# Altium PCB Inc_filter_v1.PcbDoc (part 4 of 4)
Units mil, origin at the board's own origin, x right, y up, seen from the top; angles counter-clockwise.
Board outline 13370 x 13370 mil, 2 copper layers (Top Layer, Bottom Layer); 602 components, 261 nets, 1625 pads, 355 vias.
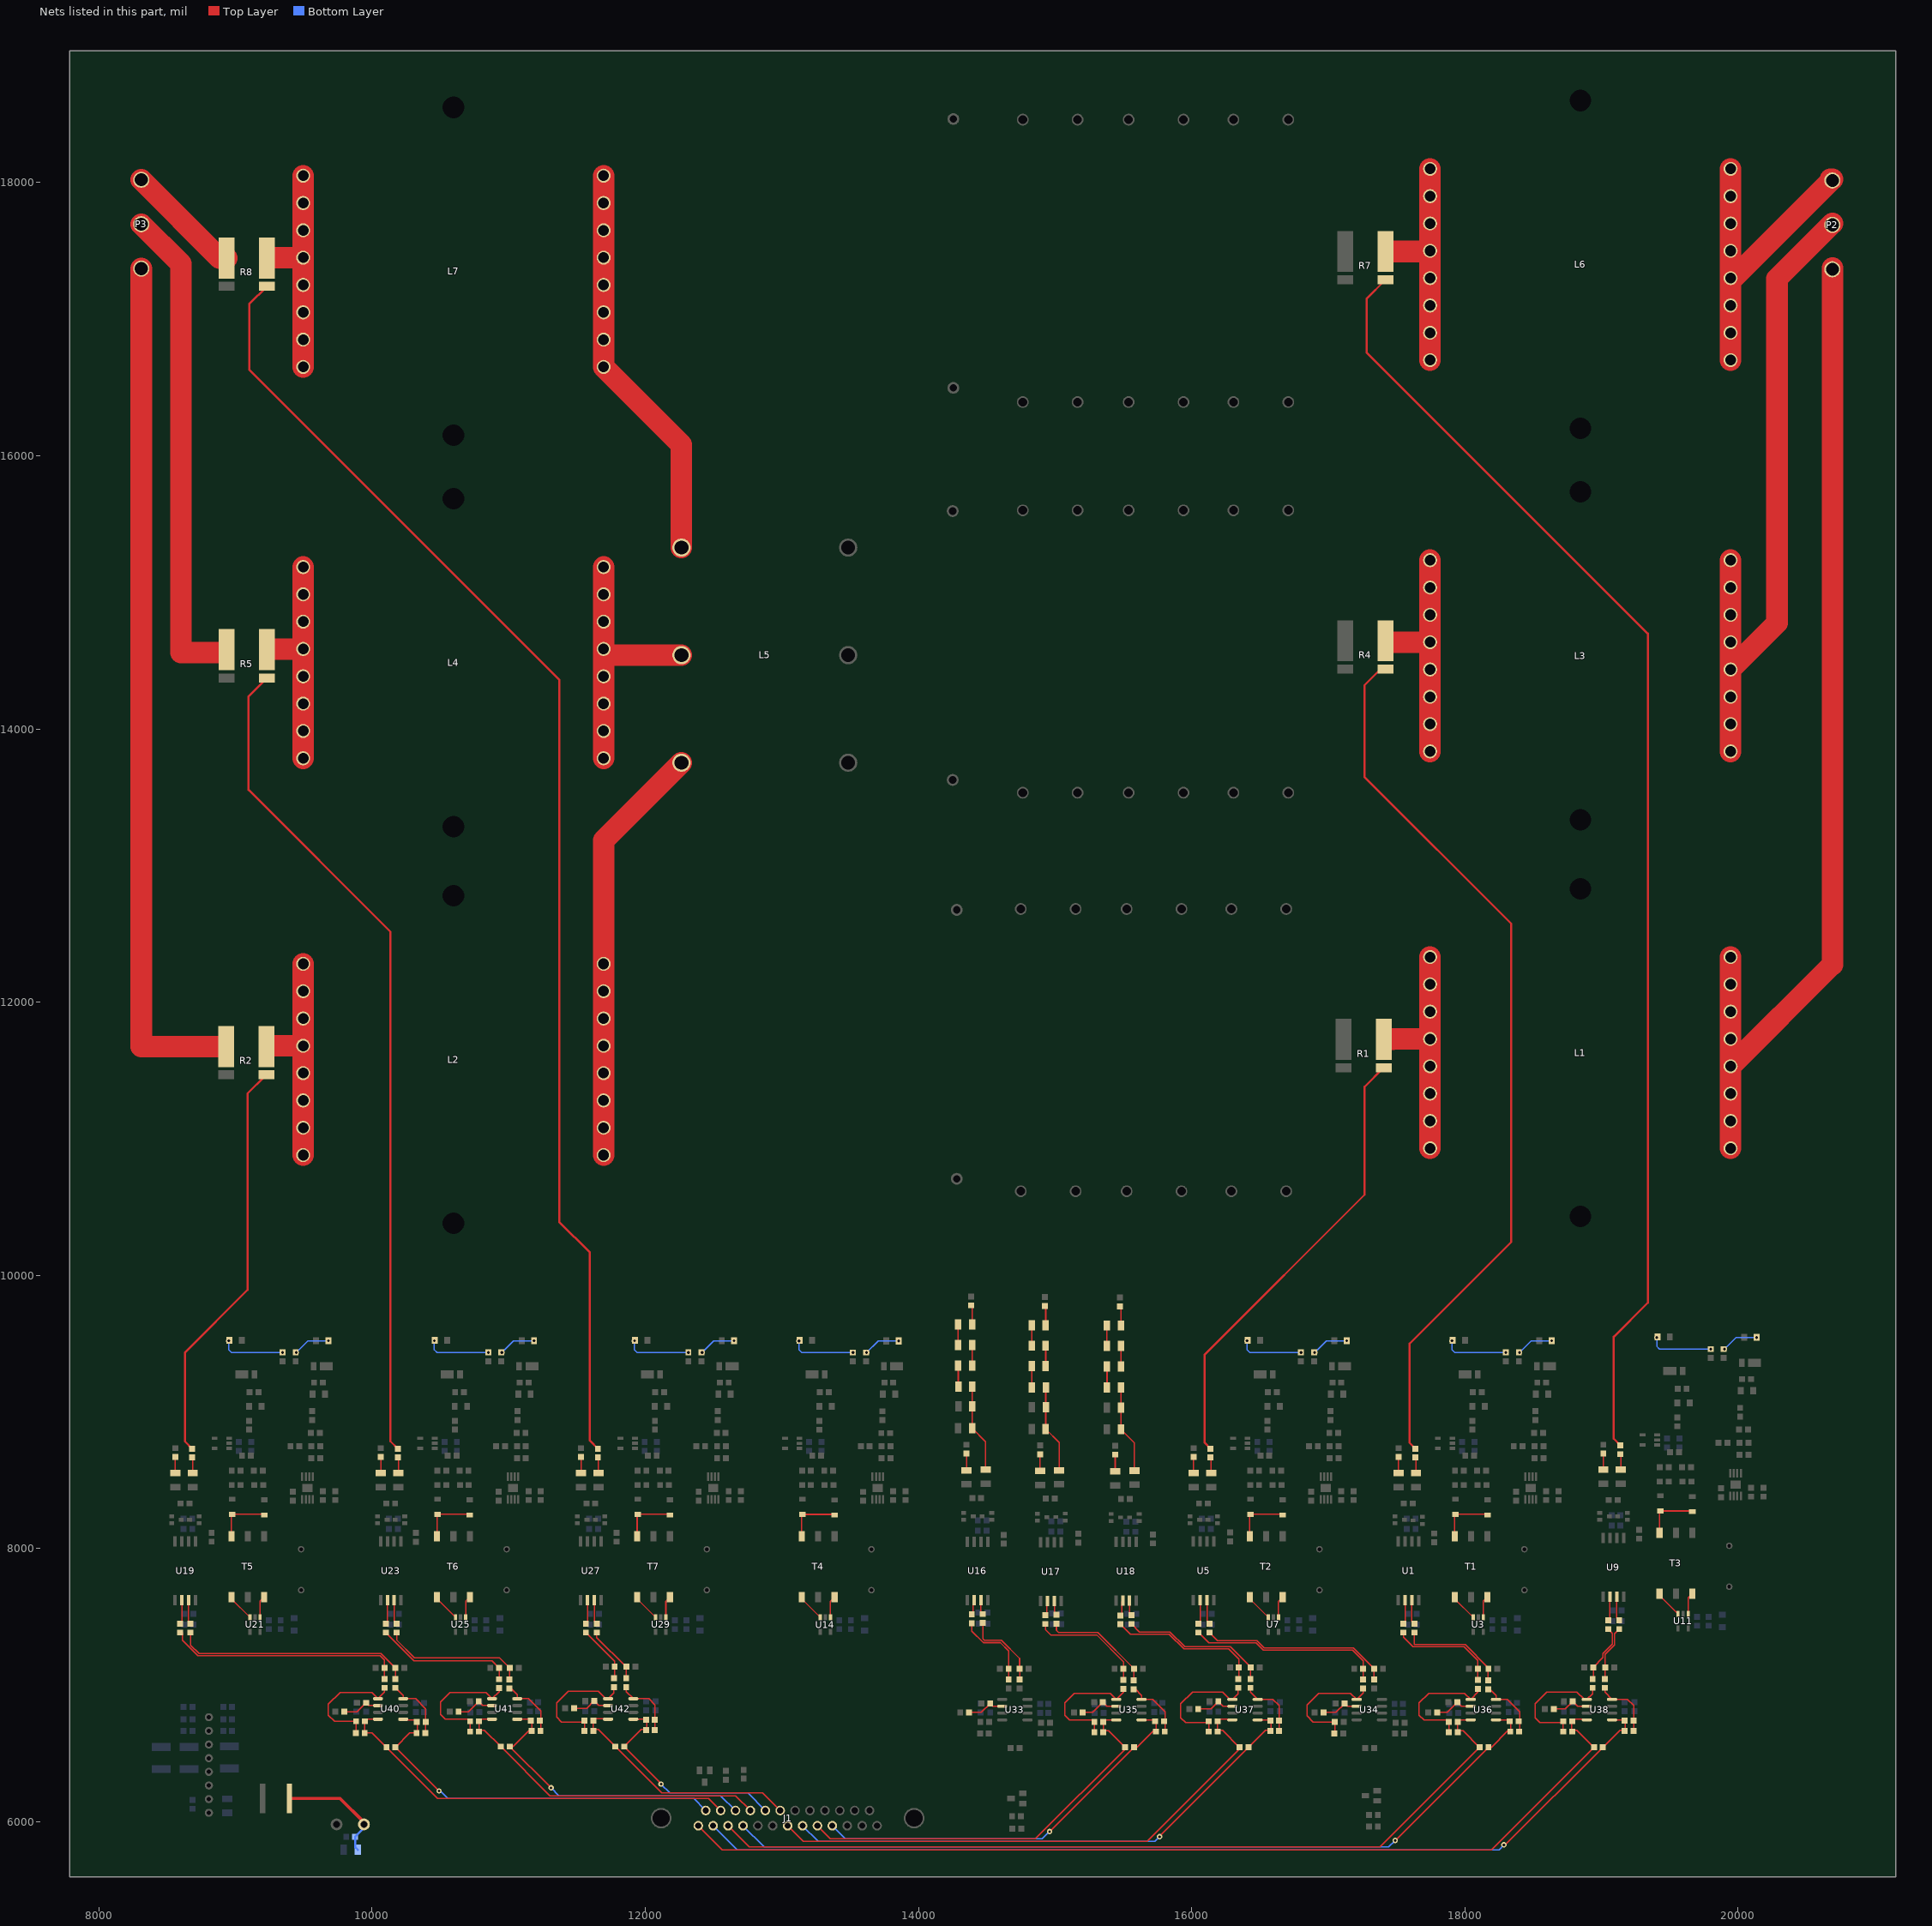
[diagram p4: the nets of this part, all layers, seen from the top]

## Via types
v1: diameter 40, hole 20, Top Layer to Bottom Layer, 355 vias

## Nets (pads, with @x,y where several pads share a name; then routed paths per layer and width w, separated by ;. In a path a pad name is that pad's centre, name@x,y a point inside that pad or via, vN(x,y) a via of type N, cw(c..) or ccw(c..) an arc to the next point about the centre after c; other vN are vias at no path point) (continued)
NetC223_2: C223.2 R115.1 R119.2 U34.1 | length 903.2
  Top Layer w7.87: C223.2@17045.04,6645 17047.52,6647.48 R119.2@17047.52,6730 16890,6730 16845,6775 16845,6855 16930,6940 17162.48,6940 U34.1@17207.48,6895 17255,6942.52 R115.1@17255,6975
NetC224_1: C224.1 J1.10 R120.1 R128.1 U35.5 | length 2932.1
  Top Layer w7.87: v1(14960,5927.52) R128.1@15577.48,6545 15600,6545 15720,6665 15740,6665 15740,6750 15735,6745 U35.5@15632.52,6745
  Bottom Layer w7.87: J1.10@13369.06,5970 13464.06,5875 14905,5875 14957.52,5927.52 v1(14960,5927.52)
NetC224_2: C224.2 R120.2 R124.1 U35.8 | length 446.9
  Top Layer w7.87: R124.1@15585,6972.52 15632.52,6925 U35.8@15632.52,6895 15715,6895 15804.96,6805.04 C224.2@15804.96,6665
NetC225_1: C225.1 J1.4 R121.1 R129.1 U36.5 | length 6231.1
  Top Layer w7.87: v1(17490,5862.52) R129.1@18172.48,6545 18195,6545 18315,6665 18335,6665 18335,6750 18330,6745 U36.5@18227.52,6745
  Bottom Layer w7.87: J1.4@12714.72,5970 12869.72,5815 17442.48,5815 v1(17490,5862.52)
NetC225_2: C225.2 R121.2 R125.1 U36.8 | length 446.9
  Top Layer w7.87: R125.1@18180,6972.52 18227.52,6925 U36.8@18227.52,6895 18310,6895 18399.96,6805.04 C225.2@18399.96,6665
NetC236_1: C236.1 J1.9 R128.2 R133.1 U35.4 | length 2965
  Top Layer w7.87: J1.9@13260,5970 13355,5875 14855,5875 15512.52,6532.52 R128.2@15512.52,6545 15392.52,6665 15350,6665 15352.48,6667.48 R133.1@15352.48,6730 15352.48,6745 U35.4@15447.48,6745
NetC236_2: C236.2 R130.1 R133.2 U35.1 | length 927.4
  Top Layer w7.87: C236.2@15285.04,6665 15287.52,6667.48 R133.2@15287.52,6730 15287.52,6745 15105,6745 15070,6780 15070,6870 15140,6940 15402.48,6940 U35.1@15447.48,6895 15500,6947.52 R130.1@15500,6972.52
NetC237_1: C237.1 J1.3 R129.2 R135.1 U36.4 | length 6256.7
  Top Layer w7.87: J1.3@12605.67,5970 12760.67,5815 17377.52,5815 R129.2@18107.52,6545 17987.52,6665 17945,6665 17947.48,6667.48 R135.1@17947.48,6730 17947.48,6745 U36.4@18042.48,6745
NetC237_2: C237.2 R131.1 R135.2 U36.1 | length 927.4
  Top Layer w7.87: C237.2@17880.04,6665 17882.52,6667.48 R135.2@17882.52,6730 17882.52,6745 17700,6745 17665,6780 17665,6870 17735,6940 17997.48,6940 U36.1@18042.48,6895 18095,6947.52 R131.1@18095,6972.52
NetC238_1: C238.1 J1.8 R136.1 R144.1 U37.5 | length 3995.3
  Top Layer w7.87: v1(15765,5890) 15765,5895.04 R144.1@16414.96,6545 16539.96,6670 16577.52,6670 16580,6672.48 16580,6750 16575,6745 U37.5@16482.52,6745
  Bottom Layer w7.87: J1.8@13150.94,5970 13265.94,5855 15730,5855 v1(15765,5890)
NetC238_2: C238.2 R136.2 R140.1 U37.8 | length 467.9
  Top Layer w7.87: R140.1@16430,6980 16430,6947.52 U37.8@16482.52,6895 16595,6895 16639.96,6850.04 R136.2@16639.96,6740 C238.2@16639.96,6665
NetC239_1: C239.1 J1.2 R137.1 R145.1 U38.5 | length 7291.4
  Top Layer w7.87: v1(18285,5830) 18294.96,5830 R145.1@19009.96,6545 19134.96,6670 19172.52,6670 19175,6672.48 19175,6750 19170,6745 U38.5@19077.52,6745
  Bottom Layer w7.87: J1.2@12496.61,5970 12671.61,5795 18250,5795 v1(18285,5830)
NetC239_2: C239.2 R137.2 R141.1 U38.8 | length 467.9
  Top Layer w7.87: R141.1@19025,6980 19025,6947.52 U38.8@19077.52,6895 19190,6895 19234.96,6850.04 R137.2@19234.96,6740 C239.2@19234.96,6665
NetC250_1: C250.1 J1.7 R144.2 R149.1 U37.4 | length 4056.7
  Top Layer w7.87: J1.7@13041.89,5970 13156.89,5855 15675,5855 16350,6530 R144.2@16350,6545 16225,6670 16187.48,6670 16187.48,6750 16292.48,6750 U37.4@16297.48,6745
NetC250_2: C250.2 R146.1 R149.2 U37.1 | length 927.6
  Top Layer w7.87: C250.2@16125.04,6660 16125.04,6725 15955,6725 15920,6760 15920,6865 16005,6950 16225,6950 16280,6895 U37.1@16297.48,6895 16340,6937.52 R146.1@16340,6980
NetC251_1: C251.1 J1.1 R145.2 R151.1 U38.4 | length 7347
  Top Layer w7.87: J1.1@12387.56,5970 12562.56,5795 18195,5795 R145.2@18945,6545 18820,6670 18782.48,6670 18782.48,6750 18887.48,6750 U38.4@18892.48,6745
NetC251_2: C251.2 R147.1 R151.2 U38.1 | length 927.6
  Top Layer w7.87: C251.2@18720.04,6660 18720.04,6725 18550,6725 18515,6760 18515,6865 18600,6950 18820,6950 18875,6895 U38.1@18892.48,6895 18935,6937.52 R147.1@18935,6980
NetC254_1: C254.1 J1.25 R152.1 R156.1 U40.5 | length 2856.6
  Top Layer w7.87: U40.5@10227.56,6750 10232.56,6745 10330.08,6745 10330.08,6650 C254.1@10325.04,6650 10275.04,6650 R156.1@10170.04,6545 v1(10490,6225)
  Bottom Layer w7.87: v1(10490,6225) 10500,6225 10555,6170 12355,6170 J1.25@12435,6090
NetC254_2: C254.2 R152.2 R154.1 U40.8 | length 477.4
  Top Layer w7.87: R154.1@10170.04,6980 10227.56,6922.48 U40.8@10227.56,6900 10320.04,6900 10392.52,6827.52 R152.2@10392.52,6730 10392.52,6652.52 C254.2@10390,6650
NetC260_1: C260.1 J1.24 R156.2 R159.1 U40.4 | length 3028.7
  Top Layer w7.87: U40.4@10042.52,6750 9962.52,6750 R159.1@9947.52,6735 9945.04,6732.52 C260.1@9945.04,6650 10000.08,6650 R156.2@10105.08,6545 10480.08,6170 12462.95,6170 J1.24@12551.14,6081.81
NetC260_2: C260.2 R157.1 R159.2 U40.1 | length 903.2
  Top Layer w7.87: C260.2@9880.08,6650 9882.56,6652.48 R159.2@9882.56,6735 9725.04,6735 9680.04,6780 9680.04,6860 9765.04,6945 9997.52,6945 U40.1@10042.52,6900 10090.04,6947.52 R157.1@10090.04,6980
NetC261_1: C261.1 J1.23 R160.1 R164.1 U41.5 | length 2253.4
  Top Layer w7.87: U41.5@11062.56,6750 11165.04,6750 11170.04,6755 11170.04,6670 11150.04,6670 11030.04,6550 R164.1@11007.52,6550 v1(11310,6247.52)
  Bottom Layer w7.87: v1(11310,6247.52) 11367.52,6190 12552.01,6190 J1.23@12660.2,6081.81
NetC261_2: C261.2 R160.2 R162.1 U41.8 | length 446.9
  Top Layer w7.87: R162.1@11015.04,6977.52 11062.56,6930 U41.8@11062.56,6900 11145.04,6900 11235,6810.04 C261.2@11235,6670
NetC267_1: C267.1 J1.22 R164.2 R167.1 U41.4 | length 2408.9
  Top Layer w7.87: U41.4@10877.52,6750 10782.52,6750 R167.1@10782.52,6735 10782.52,6672.48 10780.04,6670 10822.56,6670 R164.2@10942.56,6550 11302.56,6190 12661.06,6190 J1.22@12769.25,6081.81
NetC267_2: C267.2 R165.1 R167.2 U41.1 | length 927.4
  Top Layer w7.87: C267.2@10715.08,6670 10717.56,6672.48 R167.2@10717.56,6735 10717.56,6750 10535.04,6750 10500.04,6785 10500.04,6875 10570.04,6945 10832.52,6945 U41.1@10877.52,6900 10930.04,6952.52 R165.1@10930.04,6977.52
NetC268_1: C268.1 J1.21 R168.1 R172.1 U42.5 | length 1625.1
  Top Layer w7.87: U42.5@11912.56,6750 12005.04,6750 12010.04,6755 12010.04,6677.48 12007.56,6675 11970,6675 R172.1@11845,6550 12115,6280 v1(12115,6275)
  Bottom Layer w7.87: v1(12115,6275) 12180,6210 12750.12,6210 J1.21@12878.31,6081.81
NetC268_2: C268.2 R168.2 R170.1 U42.8 | length 467.9
  Top Layer w7.87: R170.1@11860.04,6985 11860.04,6952.52 U42.8@11912.56,6900 12025.04,6900 12070,6855.04 R168.2@12070,6745 C268.2@12070,6670
NetC274_1: C274.1 J1.20 R172.2 R175.1 U42.4 | length 1807.6
  Top Layer w7.87: U42.4@11727.52,6750 11722.52,6755 11617.52,6755 11617.52,6675 11655.04,6675 R172.2@11780.04,6550 12120.04,6210 12859.17,6210 J1.20@12987.36,6081.81
NetC274_2: C274.2 R173.1 R175.2 U42.1 | length 927.6
  Top Layer w7.87: C274.2@11555.08,6665 11555.08,6730 11385.04,6730 11350.04,6765 11350.04,6870 11435.04,6955 11655.04,6955 11710.04,6900 U42.1@11727.52,6900 11770.04,6942.52 R173.1@11770.04,6985
NetC275_1: C275.1 C276.1 L8.1 P1.1 | length 837.7
  Top Layer w23.62: L8.1@9395,6170 9765,6170 P1.1@9940,5995
  Bottom Layer w15.75: C275.1@9895,5795 9875,5815 C276.1@9875,5890 9940,5955 P1.1@9940,5980
NetD3_1: D3.1 D6.2 T1.6 | length 398.9
  Top Layer w10: T1.6@17925.2,8090.28 17925.2,8244.92 D3.1@17930.28,8250 18160.28,8250 D6.2@18165.28,8245
NetD4_K: D4.K R15.2 | length 475.3
  Top Layer w10: D4.K@17905.28,9520.28 D4.K@17910,9525
  Bottom Layer w10: v1@17905.28,9520.28 v1(17905.28,9520) 17905.28,9454.92 17925.24,9434.96 v1(18300.28,9434.96)
NetD7_A: D7.A R17.2 | length 289.4
  Top Layer w10: R17.2@18395.28,9435 v1(18400.28,9435) ; D7.A@18625.28,9510 v1(18635.28,9520)
  Bottom Layer w10: v1(18400.28,9435) 18485.28,9520 v1(18635.28,9520)
NetD11_1: D11.1 D14.2 T2.6 | length 398.9
  Top Layer w10: T2.6@16425.2,8090.28 16425.2,8244.92 D11.1@16430.28,8250 16660.28,8250 D14.2@16665.28,8245
NetD12_K: D12.K R24.2 | length 475.3
  Top Layer w10: D12.K@16405.28,9520.28 D12.K@16410,9525
  Bottom Layer w10: v1@16405.28,9520.28 v1(16405.28,9520) 16405.28,9454.92 16425.24,9434.96 v1(16800.28,9434.96)
NetD15_A: D15.A R26.2 | length 289.4
  Top Layer w10: R26.2@16895.28,9435 v1(16900.28,9435) ; D15.A@17125.28,9510 v1(17135.28,9520)
  Bottom Layer w10: v1(16900.28,9435) 16985.28,9520 v1(17135.28,9520)
NetD19_1: D19.1 D22.2 T3.6 | length 398.9
  Top Layer w10: T3.6@19424.92,8115.28 19424.92,8269.92 D19.1@19430,8275 19660,8275 D22.2@19665,8270
NetD20_K: D20.K R33.2 | length 475.3
  Top Layer w10: D20.K@19405,9545.28 D20.K@19409.72,9550
  Bottom Layer w10: v1@19405,9545.28 v1(19405,9545) 19405,9479.92 19424.96,9459.96 v1(19800,9459.96)
NetD23_A: D23.A R35.2 | length 289.4
  Top Layer w10: R35.2@19895,9460 v1(19900,9460) ; D23.A@20125,9535 v1(20135,9545)
  Bottom Layer w10: v1(19900,9460) 19985,9545 v1(20135,9545)
NetD25_1: D25.1 D28.2 T4.6 | length 398.9
  Top Layer w10: T4.6@13144.92,8090 13144.92,8244.65 D25.1@13150,8249.72 13380,8249.72 D28.2@13385,8244.72
NetD26_K: D26.K R37.2 | length 475.3
  Top Layer w10: D26.K@13125,9520 D26.K@13129.72,9524.72
  Bottom Layer w10: v1@13125,9520 v1(13125,9519.72) 13125,9454.65 13144.96,9434.68 v1(13520,9434.68)
NetD29_A: D29.A R39.2 | length 289.4
  Top Layer w10: R39.2@13615,9434.72 v1(13620,9434.72) ; D29.A@13845,9509.72 v1(13855,9519.72)
  Bottom Layer w10: v1(13620,9434.72) 13705,9519.72 v1(13855,9519.72)
NetD39_1: D39.1 D42.2 T5.6 | length 398.9
  Top Layer w10: T5.6@8969.92,8090.28 8969.92,8244.92 D39.1@8975,8250 9205,8250 D42.2@9210,8245
NetD40_K: D40.K R82.2 | length 475.3
  Top Layer w10: D40.K@8950,9520.28 D40.K@8954.72,9525
  Bottom Layer w10: v1@8950,9520.28 v1(8950,9520) 8950,9454.92 8969.96,9434.96 v1(9345,9434.96)
NetD43_A: D43.A R84.2 | length 289.4
  Top Layer w10: R84.2@9440,9435 v1(9445,9435) ; D43.A@9670,9510 v1(9680,9520)
  Bottom Layer w10: v1(9445,9435) 9530,9520 v1(9680,9520)
NetD47_1: D47.1 D50.2 T6.6 | length 398.9
  Top Layer w10: T6.6@10474.92,8090.28 10474.92,8244.92 D47.1@10480,8250 10710,8250 D50.2@10715,8245
NetD48_K: D48.K R91.2 | length 475.3
  Top Layer w10: D48.K@10455,9520.28 D48.K@10459.72,9525
  Bottom Layer w10: v1@10455,9520.28 v1(10455,9520) 10455,9454.92 10474.96,9434.96 v1(10850,9434.96)
NetD51_A: D51.A R93.2 | length 289.4
  Top Layer w10: R93.2@10945,9435 v1(10950,9435) ; D51.A@11175,9510 v1(11185,9520)
  Bottom Layer w10: v1(10950,9435) 11035,9520 v1(11185,9520)
NetD55_1: D55.1 D58.2 T7.6 | length 398.9
  Top Layer w10: T7.6@11940.2,8090.28 11940.2,8244.92 D55.1@11945.28,8250 12175.28,8250 D58.2@12180.28,8245
NetD56_K: D56.K R100.2 | length 475.3
  Top Layer w10: D56.K@11920.28,9520.28 D56.K@11925,9525
  Bottom Layer w10: v1@11920.28,9520.28 v1(11920.28,9520) 11920.28,9454.92 11940.24,9434.96 v1(12315.28,9434.96)
NetD59_A: D59.A R102.2 | length 289.4
  Top Layer w10: R102.2@12410.28,9435 v1(12415.28,9435) ; D59.A@12640.28,9510 v1(12650.28,9520)
  Bottom Layer w10: v1(12415.28,9435) 12500.28,9520 v1(12650.28,9520)
NetFB1_1: FB1.1 R4.3 | length 6558.7
  Top Layer w15.75: R4.3@17414.09,14437.91 17382.91,14437.91 17263.75,14318.75 17263.75,13649.84 18338.75,12574.84 18338.75,10243.57 17595,9499.82 17595,8773.92 FB1.1@17638,8730.92
NetFB1_2: FB1.2 R11.1 | length 115.3
  Top Layer w7.87: FB1.2@17638,8665.96 17642,8661.96 R11.1@17642,8552.32
NetFB2_2: FB2.2 R14.1 | length 117.6
  Top Layer w7.87: R14.1@17514,8552.32 FB2.2@17514,8669.96
NetFB5_1: FB5.1 R1.3 | length 3363.7
  Top Layer w7.87: FB5.1@16135,8734.92 16130,8739.92 FB5.1@16135,8744.92
  Top Layer w15.75: FB5.1@16138,8730.92 16095,8773.92 16095,9419.82 17265,10589.82 17265,11380 R1.3@17405,11520
NetFB5_2: FB5.2 R20.1 | length 115.3
  Top Layer w7.87: FB5.2@16138,8665.96 16142,8661.96 R20.1@16142,8552.32
NetFB6_2: FB6.2 R23.1 | length 117.6
  Top Layer w7.87: R23.1@16014,8552.32 FB6.2@16014,8669.96
NetFB9_1: FB9.1 R7.3 | length 9565.2
  Top Layer w15.75: R7.3@17419.09,17287.91 17280,17148.82 17280,16755.75 19338.75,14697 19338.75,9798.75 19090,9550 19090,8803.65 FB9.1@19137.72,8755.92
NetFB9_2: FB9.2 R29.1 | length 115.3
  Top Layer w7.87: FB9.2@19137.72,8690.96 19141.72,8686.96 R29.1@19141.72,8577.32
NetFB10_2: FB10.2 R32.1 | length 117.6
  Top Layer w7.87: R32.1@19013.72,8577.32 FB10.2@19013.72,8694.96
NetFB15_2: FB15.2 R42.1 | length 142.6
  Top Layer w10: FB15.2@14386.18,9780.04 14392.36,9773.86 R42.1@14392.36,9640
NetFB16_2: FB16.2 R54.1 | length 142.6
  Top Layer w10: FB16.2@14924.96,9775 14931.14,9768.82 R54.1@14931.14,9634.96
NetFB17_2: FB17.2 R66.1 | length 142.6
  Top Layer w10: FB17.2@15475,9772.52 15481.18,9766.34 R66.1@15481.18,9632.48
NetFB18_1: FB18.1 R2.3 | length 3009.6
  Top Layer w7.87: FB18.1@8682.72,8730.92 FB18.1@8685,8733.2 ; R2.3@9215,11457.91 R2.3@9225,11467.91
  Top Layer w15.75: FB18.1@8682.72,8730.92 8628.62,8785.02 8628.62,9433.62 9088.62,9893.62 9088.62,11331.54 R2.3@9215,11457.91
NetFB18_2: FB18.2 R78.1 | length 115.3
  Top Layer w7.87: FB18.2@8682.72,8665.96 8686.72,8661.96 R78.1@8686.72,8552.32
NetFB19_2: FB19.2 R81.1 | length 117.6
  Top Layer w7.87: R81.1@8558.72,8552.32 FB19.2@8558.72,8669.96
NetFB22_1: FB22.1 R5.3 | length 6182
  Top Layer w7.87: R5.3@9230,14372.91 R5.3@9250,14352.91 ; FB22.1@10187.72,8730.92 FB22.1@10190,8733.2
  Top Layer w15.75: R5.3@9230,14372.91 9095,14237.91 9095,13553.41 10133.62,12514.78 10133.62,8785.02 FB22.1@10187.72,8730.92
NetFB22_2: FB22.2 R87.1 | length 115.3
  Top Layer w7.87: FB22.2@10187.72,8665.96 10191.72,8661.96 R87.1@10191.72,8552.32
NetFB23_2: FB23.2 R90.1 | length 117.6
  Top Layer w7.87: R90.1@10063.72,8552.32 FB23.2@10063.72,8669.96
NetFB26_1: FB26.1 R8.3 | length 9620.4
  Top Layer w15.75: R8.3@9230,17240 9100,17110 9100,16630 11370,14360 11370,10390 11593.75,10166.25 11593.75,8790.17 FB26.1@11653,8730.92
NetFB26_2: FB26.2 R96.1 | length 115.3
  Top Layer w7.87: FB26.2@11653,8665.96 11657,8661.96 R96.1@11657,8552.32
NetFB27_2: FB27.2 R99.1 | length 117.6
  Top Layer w7.87: R99.1@11529,8552.32 FB27.2@11529,8669.96
NetL1_1: L1.1 L1.2 L1.3 L1.4 L1.5 L1.6 L1.7 L1.8 P2.1 | length 7553.4
  Top Layer w157.48: L1.1@19945,10930 L1.2@19945,11130 L1.3@19945,11330 L1.4@19945,11530 ; L1.8@19945,12330 L1.7@19945,12130 L1.6@19945,11930 L1.5@19945,11730 L1.4@19945,11530 ; P2.1@20690,17374.8 P2.1@20690,17364.69 20690,12275 L1.4@19945,11530
NetL1_9: L1.9 L1.10 L1.11 L1.12 L1.13 L1.14 L1.15 L1.16 R1.4 | length 1676.2
  Top Layer w157.48: 17470,11727.09 17472.91,11730 L1.12@17745,11730 ; L1.16@17745,10930 L1.15@17745,11130 L1.14@17745,11330 L1.13@17745,11530 L1.12@17745,11730 ; L1.9@17745,12330 L1.10@17745,12130 L1.11@17745,11930 L1.12@17745,11730
NetL2_1: L2.1 L2.2 L2.3 L2.4 L2.5 L2.6 L2.7 L2.8 L5.6 | length 3108.5
  Top Layer w157.48: L2.1@11695,10880 L2.2@11695,11080 L2.3@11695,11280 L2.4@11695,11480 L2.5@11695,11680 L2.6@11695,11880 L2.7@11695,12080 L2.8@11695,12280 11695,13183.07 L5.6@12264.53,13752.6
NetL2_9: L2.9 L2.10 L2.11 L2.12 L2.13 L2.14 L2.15 L2.16 R2.4 | length 1625
  Top Layer w157.48: R2.4@9270,11680 L2.12@9495,11680 ; L2.16@9495,10880 L2.15@9495,11080 L2.14@9495,11280 L2.13@9495,11480 L2.12@9495,11680 ; L2.9@9495,12280 L2.10@9495,12080 L2.11@9495,11880 L2.12@9495,11680
NetL3_1: L3.1 L3.2 L3.3 L3.4 L3.5 L3.6 L3.7 L3.8 P2.2 | length 4973.6
  Top Layer w157.48: L3.1@19945,13835 L3.2@19945,14035 L3.3@19945,14235 L3.4@19945,14435 ; L3.8@19945,15235 L3.7@19945,15035 L3.6@19945,14835 L3.5@19945,14635 L3.4@19945,14435 ; P2.2@20690,17700 20285,17295 20285,14775 L3.4@19945,14435
NetL3_9: L3.9 L3.10 L3.11 L3.12 L3.13 L3.14 L3.15 L3.16 R4.4 | length 1675
  Top Layer w157.48: R4.4@17470,14635 L3.12@17745,14635 ; L3.16@17745,13835 L3.15@17745,14035 L3.14@17745,14235 L3.13@17745,14435 L3.12@17745,14635 ; L3.9@17745,15235 L3.10@17745,15035 L3.11@17745,14835 L3.12@17745,14635
NetL4_1: L4.1 L4.2 L4.3 L4.4 L4.5 L4.6 L4.7 L4.8 L5.5 | length 1988.2
  Top Layer w157.48: L4.1@11695,13785 L4.2@11695,13985 L4.3@11695,14185 L4.4@11695,14385 L4.5@11695,14585 ; L4.8@11695,15185 L4.7@11695,14985 L4.6@11695,14785 L4.5@11695,14585 ; L5.5@12264.53,14540 11740,14540 L4.5@11695,14585
NetL4_9: L4.9 L4.10 L4.11 L4.12 L4.13 L4.14 L4.15 L4.16 R5.4 | length 1620
  Top Layer w157.48: R5.4@9275,14585 L4.12@9495,14585 ; L4.16@9495,13785 L4.15@9495,13985 L4.14@9495,14185 L4.13@9495,14385 L4.12@9495,14585 ; L4.9@9495,15185 L4.10@9495,14985 L4.11@9495,14785 L4.12@9495,14585
NetL5_4: L5.4 L7.1 L7.2 L7.3 L7.4 L7.5 L7.6 L7.7 L7.8 | length 2958.5
  Top Layer w157.48: L7.8@11695,18050 L7.7@11695,17850 L7.6@11695,17650 L7.5@11695,17450 L7.4@11695,17250 L7.3@11695,17050 L7.2@11695,16850 L7.1@11695,16650 12264.53,16080.47 L5.4@12264.53,15327.4
NetL6_1: L6.1 L6.2 L6.3 L6.4 L6.5 L6.6 L6.7 L6.8 P2.3 | length 2460.2
  Top Layer w157.48: L6.1@19945,16700 L6.2@19945,16900 L6.3@19945,17100 L6.4@19945,17300 ; L6.8@19945,18100 L6.7@19945,17900 L6.6@19945,17700 L6.5@19945,17500 L6.4@19945,17300 ; P2.3@20675.2,18025.2 20690,18025.2 19964.8,17300 L6.4@19945,17300
NetL6_9: L6.9 L6.10 L6.11 L6.12 L6.13 L6.14 L6.15 L6.16 R7.4 | length 1687.1
  Top Layer w157.48: R7.4@17460,17495 17740,17495 L6.12@17745,17500 ; L6.16@17745,16700 L6.15@17745,16900 L6.14@17745,17100 L6.13@17745,17300 L6.12@17745,17500 ; L6.9@17745,18100 L6.10@17745,17900 L6.11@17745,17700 L6.12@17745,17500
NetL7_9: L7.9 L7.10 L7.11 L7.12 L7.13 L7.14 L7.15 L7.16 R8.4 | length 1612.1
  Top Layer w157.48: R8.4@9282.91,17450 L7.12@9495,17450 ; L7.16@9495,16650 L7.15@9495,16850 L7.14@9495,17050 L7.13@9495,17250 L7.12@9495,17450 ; L7.9@9495,18050 L7.10@9495,17850 L7.11@9495,17650 L7.12@9495,17450
NetP3_1: P3.1 R8.1 | length 863.3
  Top Layer w157.48: P3.1@8310,18020.2 8883.11,17447.09 R8.1@8935.91,17447.09
NetP3_2: P3.2 R5.1 | length 3515.1
  Top Layer w157.48: P3.2@8310,17695 8600,17405 8600,14560 8860,14560
NetP3_3: P3.3 R2.1 | length 6264.8
  Top Layer w157.48: P3.3@8310,17369.8 8310,11675 R2.1@8880,11675
NetR12_1: R12.1 U1.7 | length 179.5
  Top Layer w7.87: U1.7@17612,7621.96 17612,7467.96 R12.1@17630,7449.96
NetR12_2: R12.2 R125.2 R127.1 | length 791.3
  Top Layer w7.87: R12.2@17630,7385 17630,7295.75 18001.52,7295.75 18170,7127.27 R125.2@18170,7034.96
NetR13_1: R13.1 U1.6 | length 177
  Top Layer w7.87: R13.1@17550,7449.96 17562,7461.96 U1.6@17562,7621.96
NetR13_2: R13.2 R131.2 R134.1 | length 792.8
  Top Layer w7.87: R13.2@17550,7385 17550,7350 17620.13,7279.87 17994.95,7279.87 18095,7179.82 R134.1@18095,7120 R131.2@18095,7037.48
NetR21_1: R21.1 U5.7 | length 179.5
  Top Layer w7.87: U5.7@16112,7621.96 16112,7467.96 R21.1@16130,7449.96
NetR21_2: R21.2 R109.2 R111.1 | length 1394.9
  Top Layer w7.87: R21.2@16130,7385 16189.25,7325.75 16476.52,7325.75 16531.52,7270.75 17184.29,7270.75 R111.1@17335.04,7120 R109.2@17335,7039.96 R109.2@17335,7039.96
NetR22_1: R22.1 U5.6 | length 177
  Top Layer w7.87: R22.1@16050,7449.96 16062,7461.96 U5.6@16062,7621.96
NetR22_2: R22.2 R115.2 R118.1 | length 1428.5
  Top Layer w7.87: R22.2@16050,7385 16125.13,7309.87 16469.95,7309.87 16524.95,7254.87 17177.72,7254.87 17255,7177.59 R118.1@17255,7120 R115.2@17255,7039.96
NetR30_1: R30.1 U9.7 | length 179.5
  Top Layer w7.87: U9.7@19111.72,7646.96 19111.72,7492.96 R30.1@19129.72,7474.96
NetR30_2: R30.2 R141.2 R143.1 | length 408.4
  Top Layer w7.87: R141.2@19025,7044.96 19025,7127.48 R143.1@19027.52,7130 19027.52,7225.25 19095.75,7293.48 19095.75,7376.02 R30.2@19129.72,7410
NetR31_1: R31.1 U9.6 | length 177
  Top Layer w7.87: R31.1@19049.72,7474.96 19061.72,7486.96 U9.6@19061.72,7646.96
NetR31_2: R31.2 R147.2 R150.1 | length 433.9
  Top Layer w7.87: R147.2@18935,7044.96 18940,7049.96 R150.1@18940,7130 19011.65,7201.65 19011.65,7231.82 19079.87,7300.05 19079.87,7376.02 ; R31.2@19049.72,7410 19080,7379.72
NetR42_2: R42.2 R43.1 | length 150
  Top Layer w10: R43.1@14290,9490 R42.2@14290,9640
NetR43_2: R43.2 R49.1 | length 150
  Top Layer w10: R49.1@14392.36,9340 R43.2@14392.36,9490
NetR44_1: R44.1 R46.2 R47.2 R50.2 | length 649.1
  Top Layer w10: R50.2@14393.54,9185 14392.36,9183.82 R47.2@14392.36,8880 14491.18,8781.18 R44.1@14491.18,8577.36
NetR45_1: R45.1 U16.7 | length 112.1
  Top Layer w10: U16.7@14456.18,7620.87 14456.18,7534.96 R45.1@14471.18,7519.96 R45.1@14471.18,7515
NetR45_2: R45.2 R108.2 R110.1 | length 599.3
  Top Layer w7.87: R108.2@14740,7039.96 R110.1@14740.04,7120
  Top Layer w10: R45.2@14471.18,7455 14471.18,7339.27 14481.36,7329.1 14605.9,7329.1 14740,7195 R110.1@14740.04,7120
NetR48_1: R48.1 U16.6 | length 107.1
  Top Layer w10: R48.1@14391.18,7520 14400,7528.82 14400,7614.69 U16.6@14406.18,7620.87
NetR48_2: R48.2 R114.2 R116.1 | length 597.4
  Top Layer w7.87: R114.2@14660,7039.96 R116.1@14660,7105
  Top Layer w10: R48.2@14390,7452.52 14390,7395 14473.9,7311.1 14598.45,7311.1 14660,7249.54 R116.1@14660,7120 R116.1@14660,7105
NetR49_2: R49.2 R50.1 | length 155.5
  Top Layer w10: R49.2@14290,9340 14291.18,9338.82 R50.1@14291.18,9185
NetR51_1: R51.1 R52.1 | length 122.7
  Top Layer w10: R52.1@14351.18,8572.36 R51.1@14351.18,8695.04
NetR54_2: R54.2 R55.1 | length 150
  Top Layer w10: R55.1@14828.78,9484.96 R54.2@14828.78,9634.96
NetR55_2: R55.2 R61.1 | length 150
  Top Layer w10: R61.1@14931.14,9334.96 R55.2@14931.14,9484.96
NetR56_1: R56.1 R58.2 R59.2 R62.2 | length 649.1
  Top Layer w10: R62.2@14932.32,9179.96 14931.14,9178.78 R59.2@14931.14,8874.96 15029.96,8776.14 R56.1@15029.96,8572.32
NetR57_1: R57.1 U17.7 | length 112.1
  Top Layer w10: U17.7@14994.96,7615.83 14994.96,7529.92 R57.1@15009.96,7514.92 R57.1@15009.96,7509.96
NetR57_2: R57.2 R124.2 R126.1 | length 819.6
  Top Layer w7.87: R124.2@15575,7034.96 15575,7117.48 R126.1@15577.52,7120
  Top Layer w10: R57.2@15009.96,7449.96 15009.96,7400.04 15025,7385 15312.52,7385 R126.1@15577.52,7120
NetR60_1: R60.1 U17.6 | length 107.1
  Top Layer w10: R60.1@14929.96,7514.96 14938.78,7523.78 14938.78,7609.65 U17.6@14944.96,7615.83
NetR60_2: R60.2 R130.2 R132.1 | length 841.9
  Top Layer w7.87: R132.1@15496.24,7116.24 15500,7112.48 R130.2@15500,7037.48
  Top Layer w10: R60.2@14928.78,7447.48 14928.78,7406.22 14968,7367 15305.06,7367 15500,7172.06 R132.1@15500,7120
NetR61_2: R61.2 R62.1 | length 155.5
  Top Layer w10: R61.2@14828.78,9334.96 14829.96,9333.78 R62.1@14829.96,9179.96
NetR63_1: R63.1 R64.1 | length 122.7
  Top Layer w10: R64.1@14889.96,8567.32 R63.1@14889.96,8690
NetR66_2: R66.2 R67.1 | length 150
  Top Layer w10: R67.1@15378.82,9482.48 R66.2@15378.82,9632.48
NetR67_2: R67.2 R73.1 | length 150
  Top Layer w10: R73.1@15481.18,9332.48 R67.2@15481.18,9482.48
NetR68_1: R68.1 R70.2 R71.2 R74.2 | length 649.1
  Top Layer w10: R74.2@15482.36,9177.48 15481.18,9176.3 R71.2@15481.18,8872.48 15580,8773.66 R68.1@15580,8569.84
NetR69_1: R69.1 U18.7 | length 112.1
  Top Layer w10: U18.7@15545,7613.35 15545,7527.44 R69.1@15560,7512.44 R69.1@15560,7507.48
NetR69_2: R69.2 R140.2 R142.1 | length 1090.1
  Top Layer w7.87: R69.2@15560,7447.48 15617.91,7389.57 15840.43,7389.57 15950,7280 16282.52,7280 R142.1@16432.52,7130 16430,7127.48 R140.2@16430,7044.96
NetR72_1: R72.1 U18.6 | length 107.1
  Top Layer w10: R72.1@15480,7512.48 15488.82,7521.3 15488.82,7607.17 U18.6@15495,7613.35
NetR72_2: R72.2 R146.2 R148.1 | length 1118.9
  Top Layer w7.87: R72.2@15478.82,7445 15550.13,7373.69 15833.86,7373.69 15943.42,7264.13 16270.87,7264.13 16345,7190 R148.1@16345,7130 16345,7049.96 R146.2@16340,7044.96
NetR73_2: R73.2 R74.1 | length 155.5
  Top Layer w10: R73.2@15378.82,9332.48 15380,9331.3 R74.1@15380,9177.48
NetR75_1: R75.1 R76.1 | length 122.7
  Top Layer w10: R76.1@15440,8564.84 R75.1@15440,8687.52
NetR79_1: R79.1 U19.7 | length 185.1
  Top Layer w7.87: U19.7@8656.72,7621.96 8656.72,7458.28 8665.04,7449.96 R79.1@8670,7449.96 R79.1@8674.72,7449.96
NetR79_2: R79.2 R154.2 R155.1 | length 1742.1
  Top Layer w7.87: R79.2@8670,7385 8670,7292.27 8732.27,7230 10065.08,7230 R155.1@10170.08,7125 10170.04,7124.96 R154.2@10170.04,7044.96
NetR80_1: R80.1 U19.6 | length 177
  Top Layer w7.87: R80.1@8594.72,7449.96 8606.72,7461.96 U19.6@8606.72,7621.96
NetR80_2: R80.2 R157.2 R158.1 | length 1749.1
  Top Layer w7.87: R80.2@8594.72,7385 8610,7385 8610,7329.82 8725.7,7214.13 10058.5,7214.13 10090.04,7182.59 R158.1@10090.04,7125 R157.2@10090.04,7044.96
NetR88_1: R88.1 U23.7 | length 179.5
  Top Layer w7.87: U23.7@10161.72,7621.96 10161.72,7467.96 R88.1@10179.72,7449.96
NetR88_2: R88.2 R162.2 R163.1 | length 1053.7
  Top Layer w7.87: R162.2@11005.04,7039.96 11005.04,7122.48 R163.1@11007.56,7125
  Top Layer w10: R88.2@10179.72,7385 10179.72,7330.28 10310,7200 10932.56,7200 R163.1@11007.56,7125
NetR89_1: R89.1 U23.6 | length 177
  Top Layer w7.87: R89.1@10099.72,7449.96 10111.72,7461.96 U23.6@10111.72,7621.96
NetR89_2: R89.2 R165.2 R166.1 | length 1018.4
  Top Layer w7.87: R166.1@10926.28,7121.24 10930.04,7117.48 R165.2@10930.04,7042.48
  Top Layer w10: R89.2@10099.72,7385 10099.72,7384.82 10307.03,7177.52 10877.52,7177.52 R166.1@10930.04,7125
NetR97_1: R97.1 U27.7 | length 179.5
  Top Layer w7.87: U27.7@11627,7621.96 11627,7467.96 R97.1@11645,7449.96
NetR97_2: R97.2 R170.2 R171.1 | length 424.1
  Top Layer w7.87: R97.2@11645,7385 11645,7347.52 11860.04,7132.48 R170.2@11860.04,7049.96
NetR98_1: R98.1 U27.6 | length 177
  Top Layer w7.87: R98.1@11565,7449.96 11577,7461.96 U27.6@11577,7621.96
NetR98_2: R98.2 R173.2 R174.1 | length 424.1
  Top Layer w7.87: R98.2@11565,7385 11775.04,7174.96 R174.1@11775.04,7135 11775.04,7054.96 R173.2@11770.04,7049.96
NetT1_1: T1.1 U3.3 | length 204.7
  Top Layer w10: T1.1@17925.2,7645 17925.2,7631.57 U3.3@18060.47,7496.3
NetT1_3: T1.3 U3.1 | length 161.2
  Top Layer w10: U3.1@18135.28,7496.3 18135.28,7614.92 T1.3@18165.35,7645
NetT2_1: T2.1 U7.3 | length 204.7
  Top Layer w10: T2.1@16425.2,7645 16425.2,7631.57 U7.3@16560.47,7496.3
NetT2_3: T2.3 U7.1 | length 161.2
  Top Layer w10: U7.1@16635.28,7496.3 16635.28,7614.92 T2.3@16665.35,7645
NetT3_1: T3.1 U11.3 | length 204.7
  Top Layer w10: T3.1@19424.92,7670 19424.92,7656.57 U11.3@19560.2,7521.3
NetT3_3: T3.3 U11.1 | length 161.2
  Top Layer w10: U11.1@19635,7521.3 19635,7639.92 T3.3@19665.08,7670
NetT4_1: T4.1 U14.3 | length 204.7
  Top Layer w10: T4.1@13144.92,7644.72 13144.92,7631.3 U14.3@13280.2,7496.02
NetT4_3: T4.3 U14.1 | length 161.2
  Top Layer w10: U14.1@13355,7496.02 13355,7614.65 T4.3@13385.08,7644.72
NetT5_1: T5.1 U21.3 | length 204.7
  Top Layer w10: T5.1@8969.92,7645 8969.92,7631.57 U21.3@9105.2,7496.3
NetT5_3: T5.3 U21.1 | length 161.2
  Top Layer w10: U21.1@9180,7496.3 9180,7614.92 T5.3@9210.08,7645
NetT6_1: T6.1 U25.3 | length 204.7
  Top Layer w10: T6.1@10474.92,7645 10474.92,7631.57 U25.3@10610.2,7496.3
NetT6_3: T6.3 U25.1 | length 161.2
  Top Layer w10: U25.1@10685,7496.3 10685,7614.92 T6.3@10715.08,7645
NetT7_1: T7.1 U29.3 | length 204.7
  Top Layer w10: T7.1@11940.2,7645 11940.2,7631.57 U29.3@12075.47,7496.3
NetT7_3: T7.3 U29.1 | length 161.2
  Top Layer w10: U29.1@12150.28,7496.3 12150.28,7614.92 T7.3@12180.35,7645
Vocm_IL1: C213.2 R107.2 U34.2 | length 277.7
  Top Layer w7.87: R107.2@16964.96,6800 17055,6800 C213.2@17120,6865 17140,6845 U34.2@17207.48,6845
Vocm_IL2: C227.2 R123.2 U36.2 | length 288.5
  Top Layer w7.87: R123.2@17797.48,6800 17870,6800 C227.2@17945,6875 17975,6845 U36.2@18042.48,6845
Vocm_IL3: C241.2 R139.2 U38.2 | length 287.3
  Top Layer w7.87: R139.2@18642.48,6825 R139.2@18649.96,6825 18735,6825 C241.2@18790,6880 18825,6845 U38.2@18892.48,6845
Vocm_Io1: C255.2 R153.2 U40.2 | length 282.7
  Top Layer w7.87: R153.2@9795,6805 9890.04,6805 C255.2@9955.04,6870 9975.04,6850 U40.2@10042.52,6850
Vocm_Io2: C262.2 R161.2 U41.2 | length 288.5
  Top Layer w7.87: R161.2@10632.52,6805 10705.04,6805 C262.2@10780.04,6880 10810.04,6850 U41.2@10877.52,6850
Vocm_Io3: C269.2 R169.2 U42.2 | length 287.3
  Top Layer w7.87: R169.2@11477.52,6830 11570.04,6830 C269.2@11625.04,6885 11660.04,6850 U42.2@11727.52,6850
Vocm_Vo1: C212.2 R106.2 U33.2 | length 277.7
  Top Layer w7.87: R106.2@14369.96,6800 14460,6800 C212.2@14525,6865 14545,6845 U33.2@14612.48,6845
Vocm_Vo2: C226.2 R122.2 U35.2 | length 288.5
  Top Layer w7.87: R122.2@15202.48,6800 15275,6800 C226.2@15350,6875 15380,6845 U35.2@15447.48,6845
Vocm_Vo3: C240.2 R138.2 U37.2 | length 287.3
  Top Layer w7.87: R138.2@16047.48,6825 16140,6825 C240.2@16195,6880 16230,6845 U37.2@16297.48,6845
pads on no net: J1.18 J1.19 L1. L2. L3. L4. L6. L7. PS1.3 PS1.4 PS1.5 T1.5 T2.5 T3.5 T4.5 T5.5 T6.5 T7.5 U2.4 U2.5 U4. U4.7 U6.4 U6.5 U8. U8.7 U10.4 U10.5 U12. U12.7 U13.4 U13.5 U15. U15.7 U20.4 U20.5 U22. U22.7 U24.4 U24.5 U26. U26.7 U28.4 U28.5 U30. U30.7 U31. U32. U33.7 U34.7 U35.7 U36.7 U37.7 U38.7 U39. U40.7 U41.7 U42.7

## Polygon pours and split planes (outlines as drawn)
GND_PWR on Bottom Layer "Bottom Layer-No Net" (solid, pour order 34): 7900,5700 10125,5700 10125,6200 9450,6200 9450,6425 7900,6425
GND_LV on Bottom Layer "Bottom Layer-No Net" (solid, pour order 36): 7900,6525 9550,6525 9550,6300 10225,6300 10225,5700 21050,5700 21050,7675 7900,7675

## Silkscreen, mask and mechanical layers (free items; w line width, h text height)
Top Overlay:
  text "W   V   U" at 20385,18085 h86.61 r270
  text "W   V   U" at 8485,18065 h86.61 r270
  text "W   V   U" at 9690,16910 h86.61 r270
  text "Voltage Sensor" at 14415,10235 h86.61
  text "Current Sensor" at 17710,10055 h86.61
  text "U" at 14340,10020 h86.61
  text "V" at 14880,10020 h86.61
  text "W" at 15435,10020 h86.61
  text "U" at 16795,9810 h86.61
  text "V" at 18295,9810 h86.61
  text "W" at 19800,9810 h86.61
  text "14" at 13600,6250 h43.31
  text "14" at 13600,6250 h43.31
  text "25" at 12240,6240 h43.31
  text "+30V" at 10105,5810 h86.61
  text "1" at 12370,5755 h43.31
  text "13" at 13665,5755 h43.31
  text "Po-Hsu Huang / Inverter Filter and AC Measurement Board / Massachusetts Institute of Technology / 2-17-2017" at 18990,5740 h50
Mechanical 13:
  lines w10: 7785,18980 7785,19000 ; 7845,18970 7785,18990 ; 7845,19010 7785,18990 ; 14164.09,18990 7785,18990 ; 14775.91,18990 21155,18990 ; 21095,18970 21155,18990 ; 21095,19010 21155,18990 ; 21155,18980 21155,19000 ; 21165,5655 21185,5595 ; 21165,18905 21185,18965 ; 21175,5595 21195,5595 ; 21175,18965 21195,18965 ; 21185,11974.09 21185,5595 ; 21185,12585.91 21185,18965 ; 21205,5655 21185,5595 ; 21205,18905 21185,18965
  text "13370 (mil)" at 14174.09,18954.01 h60
  text "13370 (mil)" at 21220.99,11984.09 h60 r90

## Text inside footprints (layer, text, board x,y; h text height)
J1: Top Overlay "^ Board Edge ^" at 13152.13,6163.7 h39.37; Top Overlay "Pins 1, 25" at 12313.54,6163.7 h39.37